# Altium PCB Nwatch.PcbDoc
Units mm, origin at the board's own origin, x right, y up, seen from the top; angles counter-clockwise.
Board outline 37.34 x 33.78 mm, 2 copper layers (Top Layer, Bottom Layer); 62 components, 59 nets, 208 pads, 89 vias.
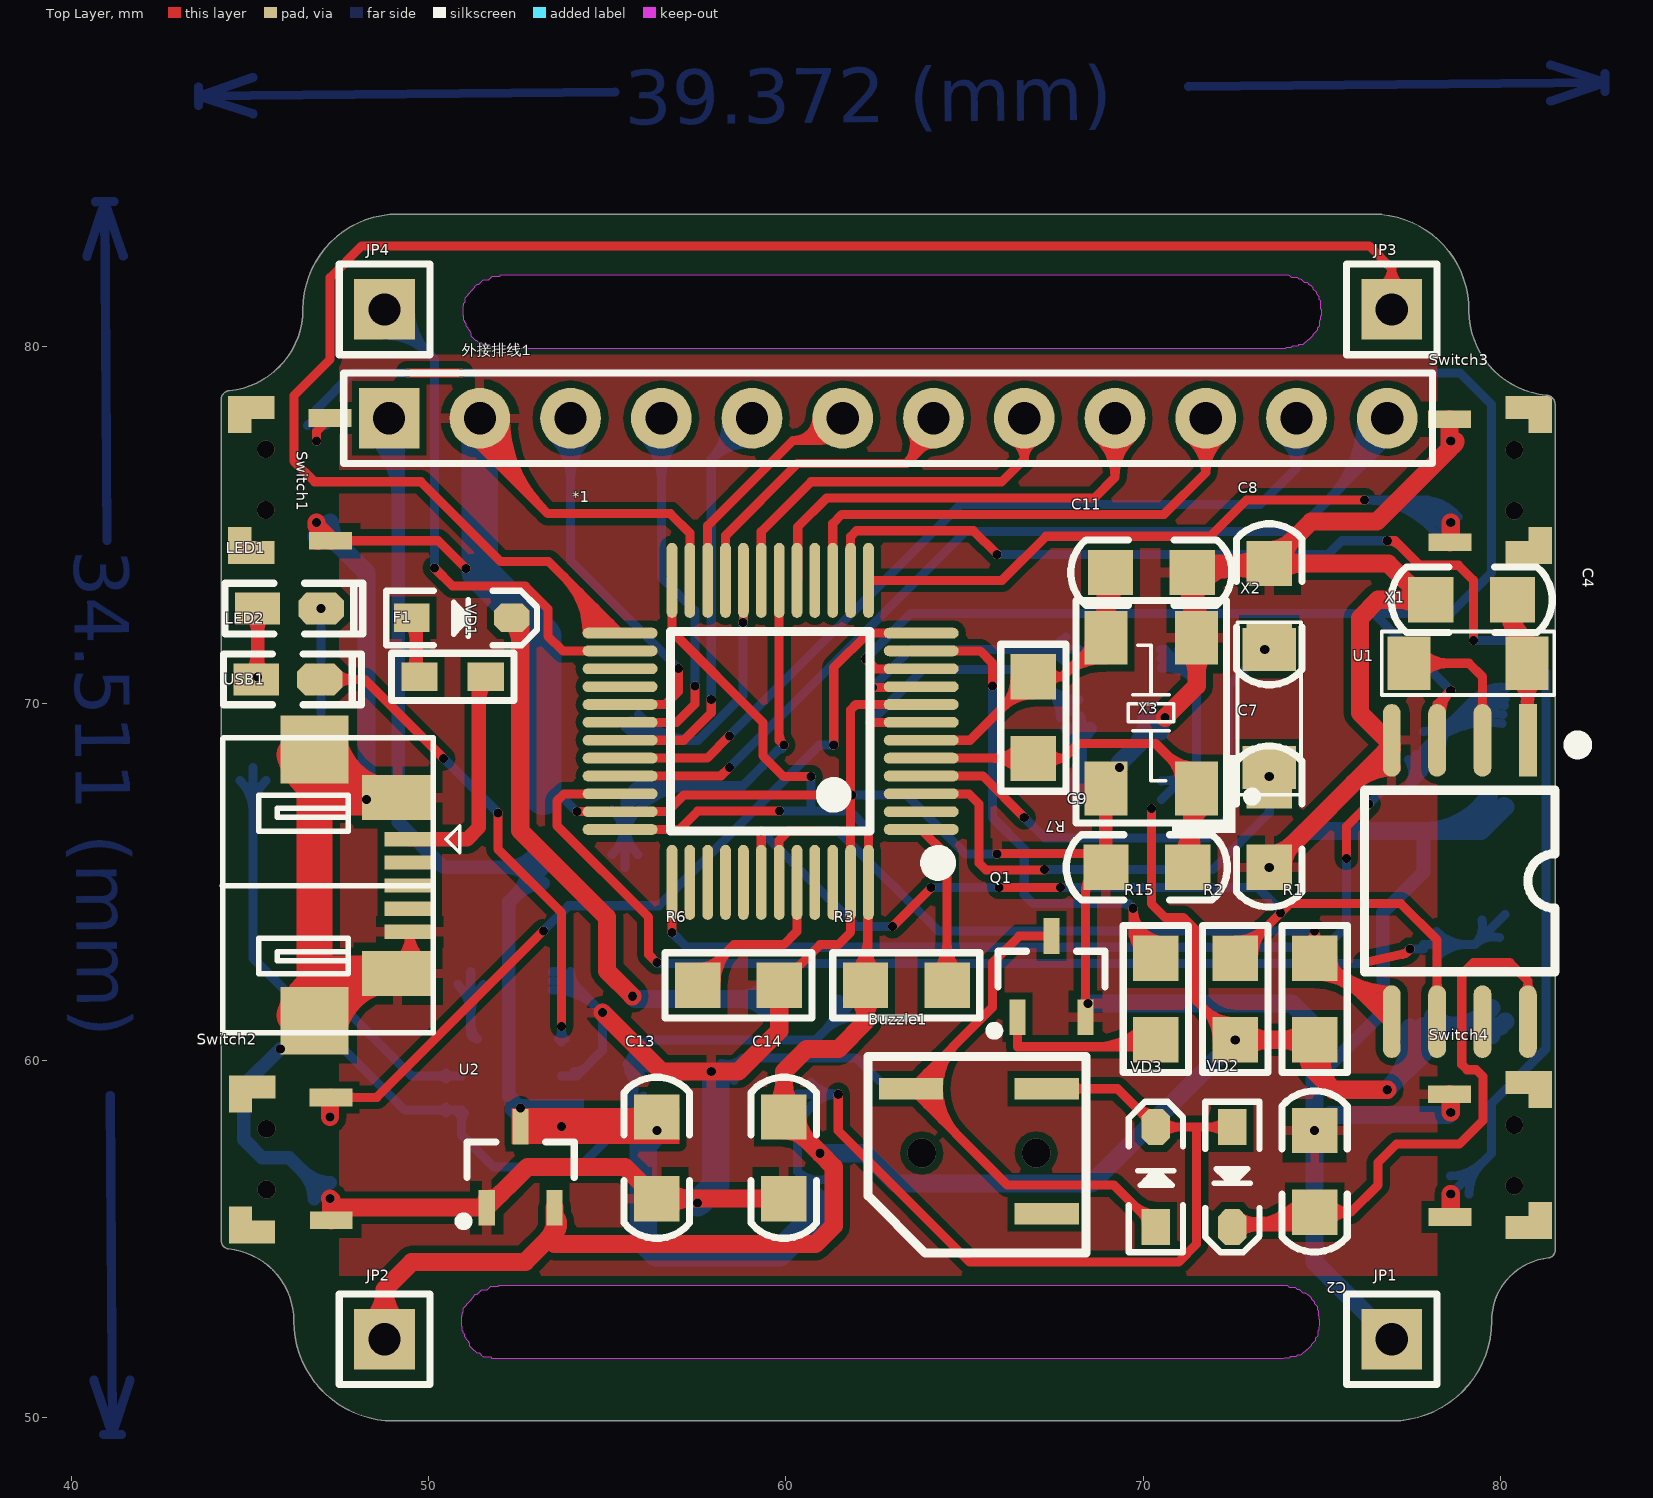
[diagram p0: Top Layer view]
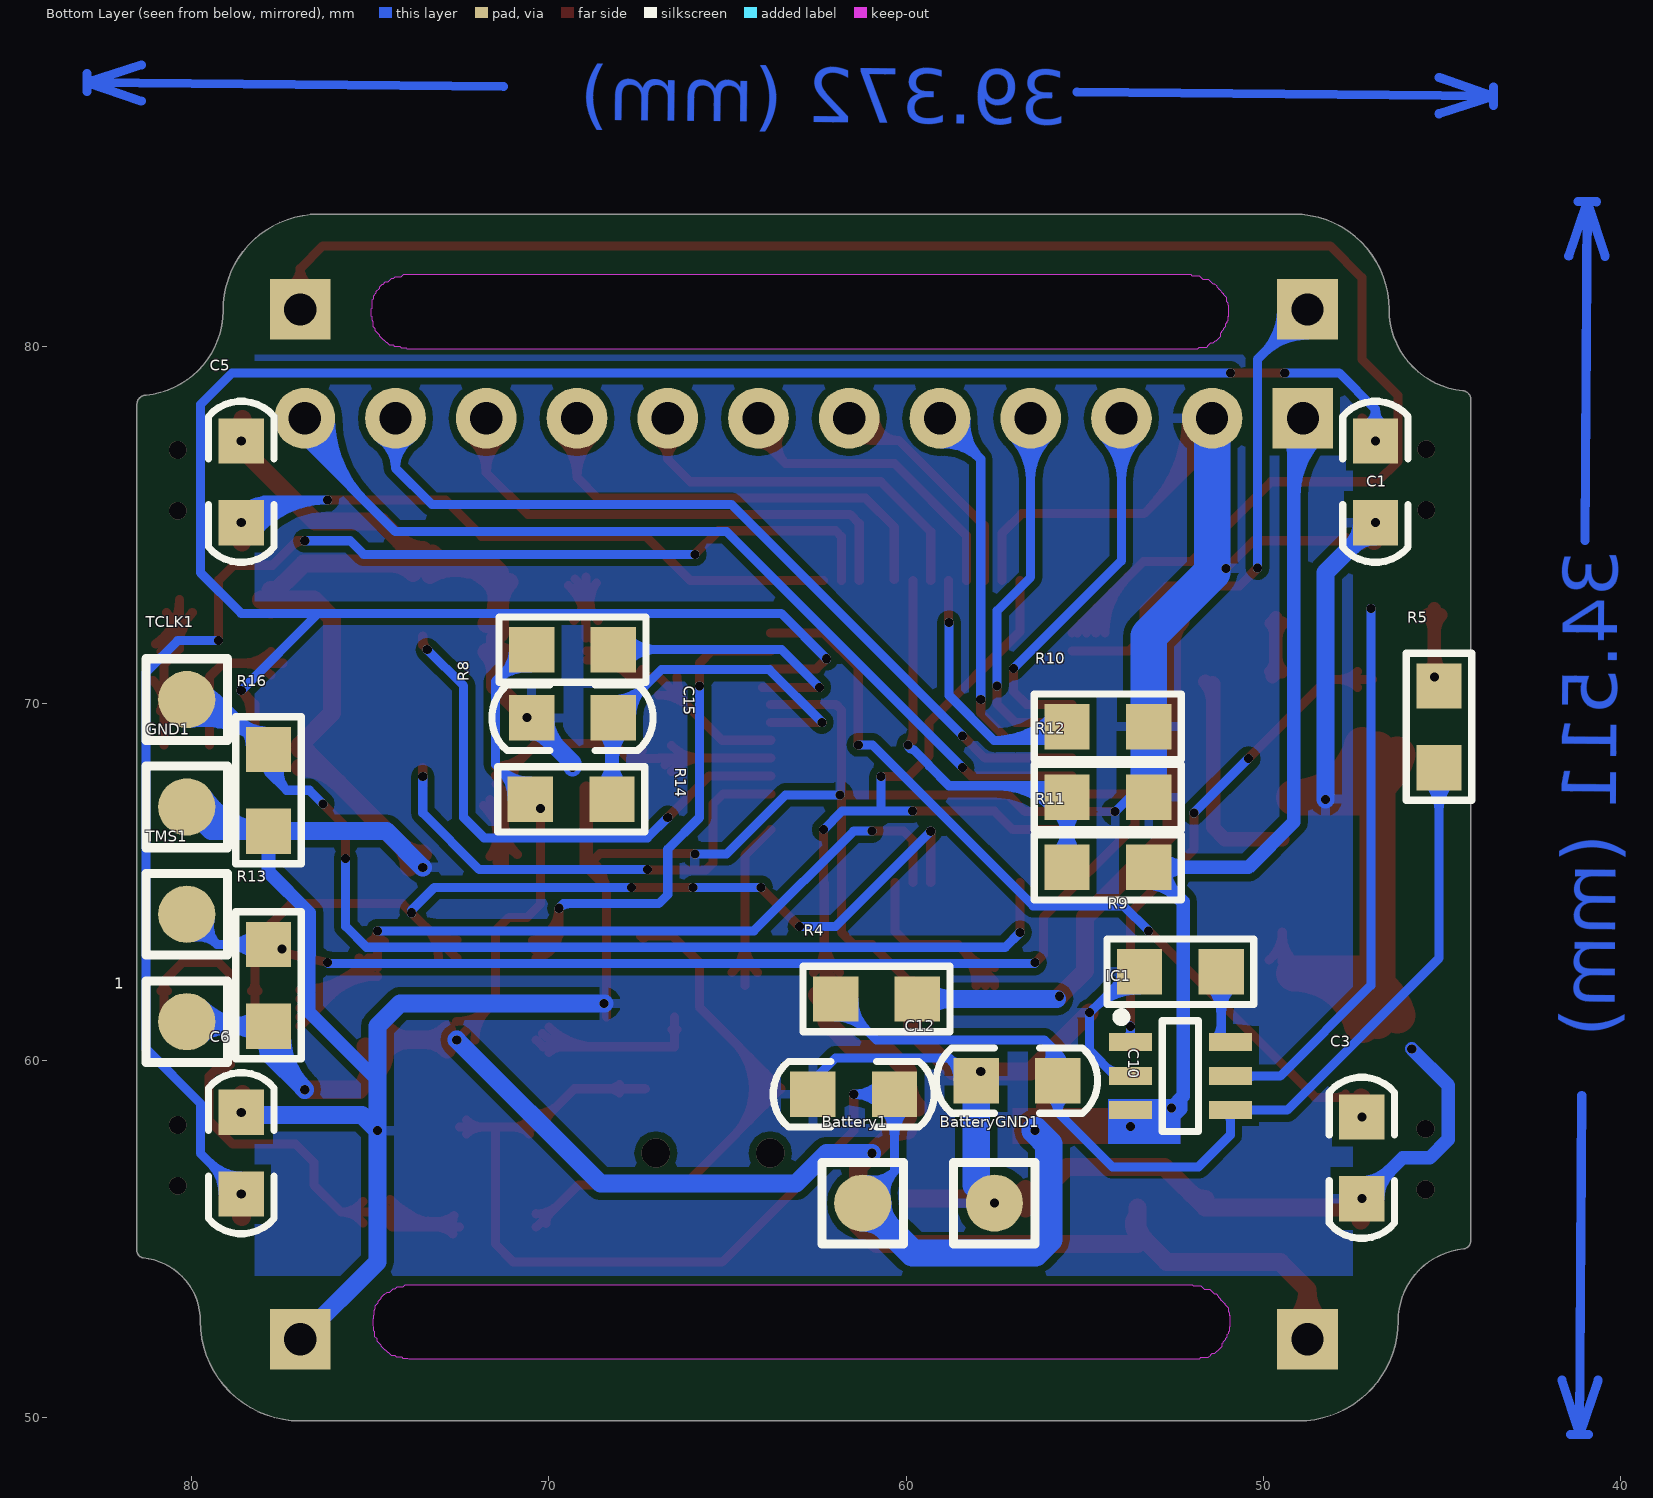
[diagram p1: Bottom Layer view, seen from below]

## Layer stack, top to bottom
Top Solder: solder mask 0.0102, Solder Resist, Dk 3.5
Top Layer: signal copper 0.0356
Dielectric 1: dielectric 0.32, FR-4, Dk 4.8
Bottom Layer: signal copper 0.0356
Bottom Solder: solder mask 0.0102, Solder Resist, Dk 3.5

## Board outline
46.228,52.705 ccw(c44.196,52.705) 44.395,54.727 cw(c44.427,54.959) 44.196,54.991 44.196,78.486 cw(c44.441,78.506) 44.42,78.751 ccw(c44.196,81.026) 46.482,81.026 cw(c49.149,81.026) 49.149,83.693 76.454,83.693 cw(c76.433,81.005) 79.121,80.984 ccw(c81.513,81.005) 81.279,78.624 cw(c81.274,78.364) 81.534,78.359 81.534,54.737 cw(c81.316,54.693) 81.36,54.474 ccw(c81.534,52.705) 79.756,52.705 cw(c76.962,52.705) 76.962,49.911 49.022,49.911 cw(c49.022,52.705)
cut-out: 51.025,81.349 51.115,81.439 51.115,81.469 51.125,81.469 51.225,81.569 51.235,81.569 51.235,81.589 51.295,81.649 51.295,81.669 51.355,81.729 51.405,81.729 51.535,81.859 51.685,81.859 51.785,81.959 51.995,81.959 52.025,81.989 74.085,81.989 74.145,81.929 74.315,81.929 74.365,81.879 74.415,81.879 74.515,81.779 74.595,81.779 74.655,81.719 74.675,81.719 74.755,81.639 74.755,81.609 74.845,81.519 74.845,81.479 74.925,81.399 74.925,81.309 74.955,81.279 74.955,81.149 74.965,81.139 74.965,81.049 74.985,81.029 74.985,80.849 74.965,80.829 74.965,80.729 74.935,80.699 74.935,80.559 74.875,80.499 74.875,80.439 74.755,80.319 74.755,80.289 74.645,80.179 74.625,80.179 74.555,80.109 74.545,80.109 74.465,80.029 74.365,80.029 74.325,79.989 74.175,79.989 74.135,79.949 73.995,79.949 73.975,79.929 51.835,79.929 51.795,79.969 51.585,79.969 51.525,80.029 51.525,80.039 51.475,80.089 51.405,80.089 51.345,80.149 51.325,80.149 51.195,80.279 51.195,80.359 51.175,80.379 51.165,80.379 51.165,80.409 51.105,80.469 51.105,80.499 51.055,80.549 51.055,80.619 51.025,80.649 51.025,80.659 51.015,80.669 51.015,80.689 50.985,80.719 50.985,80.829 50.975,80.839 50.975,81.129 50.985,81.139 50.985,81.199 51.025,81.239
cut-out: 50.977,53.07 51.067,53.16 51.067,53.19 51.077,53.19 51.177,53.29 51.187,53.29 51.187,53.31 51.247,53.37 51.247,53.39 51.307,53.45 51.357,53.45 51.487,53.58 51.637,53.58 51.737,53.68 51.947,53.68 51.977,53.71 74.037,53.71 74.097,53.65 74.267,53.65 74.317,53.6 74.367,53.6 74.467,53.5 74.547,53.5 74.607,53.44 74.627,53.44 74.707,53.36 74.707,53.33 74.797,53.24 74.797,53.2 74.877,53.12 74.877,53.03 74.907,53 74.907,52.87 74.917,52.86 74.917,52.77 74.937,52.75 74.937,52.57 74.917,52.55 74.917,52.45 74.887,52.42 74.887,52.28 74.827,52.22 74.827,52.16 74.707,52.04 74.707,52.01 74.597,51.9 74.577,51.9 74.507,51.83 74.497,51.83 74.417,51.75 74.317,51.75 74.277,51.71 74.127,51.71 74.087,51.67 73.947,51.67 73.927,51.65 51.787,51.65 51.747,51.69 51.537,51.69 51.477,51.75 51.477,51.76 51.427,51.81 51.357,51.81 51.297,51.87 51.277,51.87 51.147,52 51.147,52.08 51.127,52.1 51.117,52.1 51.117,52.13 51.057,52.19 51.057,52.22 51.007,52.27 51.007,52.34 50.977,52.37 50.977,52.38 50.967,52.39 50.967,52.41 50.937,52.44 50.937,52.55 50.927,52.56 50.927,52.85 50.937,52.86 50.937,52.92 50.977,52.96 50.977,52.98

## Design rules (kind name [scope] priority, off if disabled: settings)
Clearance [All] p1: gap=0.203
PolygonConnect [All] p1: connectstyle=Relief reliefconductorwidth=0.254 reliefentries=4 polygonreliefangle="90 Angle" airgapwidth=0.254
RoutingVias [All] p1: holewidth=0.711 width=1.27 viastyle="Through Hole" minholewidth=0.711 minwidth=1.27 maxholewidth=0.711 maxwidth=1.27
SolderMaskExpansion [All] p1: expansion=0.102
Width [All] p1: maxlimit=1.27 minlimit=0.254 preferedwidth=0.254
29 further rules are at their usual default settings.

## Components (designator, comment, footprint, x,y, rotation, side; value= is the part's Value field where it differs from the comment)
1 "TEST" "TEST 1.6" 80.137,61.087 r0 bottom
*1 "STM32F103C8T6" "LQFP48 7x7_M" 59.563,69.215 r90 top
Battery1 "TEST" "TEST 1.6" 61.214,56.007 r90 bottom
BatteryGND1 "TEST" "TEST 1.6" 57.531,56.007 r180 bottom
Buzzle1 "5020 5*5*2MM SMD无源蜂鸣器" "5020 5*5*2MM SMD贴片超薄超小电磁式无源蜂鸣器" 65.405,54.61 r180 top
C1 "104" "C 0805" 46.863,76.2 r90 bottom
C2 "104" "C 0805" 74.803,56.896 r90 top
C3 "104" "C 0805" 47.244,57.277 r90 bottom
C4 "104" "C 0805" 79.2,72.898 r0 top
C5 "104" "C 0805" 78.613,76.2 r270 bottom
C6 "104" "C 0805" 78.613,57.404 r270 bottom
C7 "15pF" "C 0805" 73.533,66.548 r90 top
C8 "15pF" "C 0805" 73.533,72.771 r270 top
C9 "22pF" "C 0805" 70.104,65.405 r0 top
C10 "105" "C 0805" 56.896,59.436 r180 bottom
C11 "22pF" "C 0805" 70.231,73.66 r180 top
C12 "105" "C 0805" 61.468,59.055 r180 bottom
C13 "104" "C 0805" 56.388,57.277 r90 top
C14 "104" "C 0805" 59.944,57.277 r90 top
C15 "104" "C 0805" 69.342,69.596 r180 bottom
F1 "1A" "R 0603" 50.673,70.739 r0 top
GND1 "TEST" "TEST 1.6" 80.137,67.098 r90 bottom
IC1 "TP4057" SOT23-6N 52.324,59.563 r270 bottom
JP1 "HDR-1X1" HDR-1X1 76.962,52.197 r0 top
JP2 "HDR-1X1" HDR-1X1 48.768,52.197 r0 top
JP3 "HDR-1X1" HDR-1X1 76.962,81.026 r0 top
JP4 "HDR-1X1" HDR-1X1 48.768,81.026 r0 top
LED1 "绿色" "LED 0603G" 46.101,72.644 r0 top
LED2 "红色" "LED 0603R" 46.063,70.66 r0 top
Q1 "S9014" SOT23-3L 67.437,62.357 r0 top
R1 "10K" "R 0805" 74.803,61.722 r90 top
R2 "10K" "R 0805" 72.581,61.722 r90 top
R3 "0R" "R 0805" 63.373,62.103 r0 top
R4 "0.8R" "R 0805" 60.833,61.722 r180 bottom
R5 "100k" "R 0805" 45.085,69.342 r270 bottom
R6 "10k" "R 0805" 58.674,62.103 r0 top
R7 "1M" "R 0805" 66.929,69.596 r270 top
R8 "0" "R 0805" 69.342,71.501 r180 bottom
R9 "2K" "R 0805" 52.324,62.484 r180 bottom
R10 "10k" "R 0805" 54.356,69.342 r0 bottom
R11 "1K" "R 0805" 54.356,65.405 r180 bottom
R12 "1K" "R 0805" 54.356,67.373 r0 bottom
R13 "10K" "R 0805" 77.851,62.103 r270 bottom
R14 "10k" "R 0805" 69.376,67.31 r0 bottom
R15 "470R" "R 0805" 70.358,61.722 r270 top
R16 "10K" "R 0805" 77.851,67.564 r90 bottom
Switch1 "Switch" 侧按键 46.838,76.298 r90 top
Switch2 "Switch" 侧按键 46.863,57.277 r90 top
Switch3 "Switch" 侧按键 78.994,76.2 r270 top
Switch4 "Switch" 侧按键 78.994,57.306 r270 top
TCLK1 "TEST" "TEST 1.6" 80.137,70.104 r0 bottom
TMS1 "TEST" "TEST 1.6" 80.137,64.093 r0 bottom
U1 "PCF8563T/F4" SOP8W_L 78.867,65.024 r270 top
U2 "XC6206P332MR" SOT23-3L 52.578,57.023 r0 top
USB1 "USB-5P" USB-MICRO_A 47.117,64.897 r270 top
VD1 "1N4148" SOD-323 50.927,72.39 r0 top
VD2 "1N4148" SOD-323 72.499,56.736 r270 top
VD3 "1N4148" SOD-323 70.358,56.736 r90 top
X1 "32.768 KHz" XTAL-3215 79.095,71.12 r0 top
X2 "32.768 KHz" XTAL-3215 73.533,69.85 r270 top
X3 "8M" XTAL-5032 70.231,69.723 r90 top
外接排线1 "HDR-1X12" HDR-1X12 48.895,77.978 r0 top

## Footprints (in the part's own frame and the unit in brackets; to place one, negate y for a bottom-side part, rotate by r counter-clockwise, add the part's x,y. Pads: shape width x height; smd on the part's side, far side on the other; paste and mask are expansions set on the pad)
"5020 5*5*2MM SMD贴片超薄超小电磁式无源蜂鸣器" [mm] "5020 5*5*2MM SMD贴片超薄超小电磁式无源蜂鸣器"
  rect 1.8x0.6 / inner rect 0x0 / far side rect 0x0 all layers, no hole paste+0 mask+0.102: 1(-1.9,-4.6) 2(1.9,-4.6) 3(-1.9,-1.1)
  silkscreen extent -3,-5.5 3.1,0, body extent -2.6,-5.4 2.6,-0.2, height 2
"C 0805" [mil] "无极性贴片电容"
  rect 50x50 smd: 1(-45,0) 2(45,0)
  silkscreen extent -89,-36 89,36, body extent -39,-24 39,24, height 20
HDR-1X1 [mm] "排针，1脚"
  rect 1.7x1.7 hole 0.9: 1(0,0)
  silkscreen extent -1.27,-1.27 1.27,1.27, body extent -1.27,-1.27 1.27,1.27, height 8.5
HDR-1X12 [mm] "排针，13脚"
  rect 1.7x1.7 hole 0.9: 1(0,0)
  round 1.7 hole 0.9: 2(2.54,0) 3(5.08,0) 4(7.62,0) 5(10.16,0) 6(12.7,0) 7(15.24,0) 8(17.78,0) 9(20.32,0) 10(22.86,0) 11(25.4,0) 12(27.94,0)
  silkscreen extent -1.27,-1.27 29.21,1.27, body extent -1.27,-1.27 29.21,1.27, height 8.5
"LED 0603G" [mil] "绿色0603LED"
  rect 50x35 smd: 1(-35,0.26)
  oct 50x35 smd: 2(35,0.26)
  silkscreen extent -71,-28 81,28, body extent -31,-16 32,16, height 24
"LED 0603R" [mil] "红色0603LED"
  rect 50x35 smd: 1(-35,0.26)
  oct 50x35 smd: 2(35,0.26)
  silkscreen extent -71,-28 81,28, body extent -31,-16 32,16, height 24
"LQFP48 7x7_M" [mm] "48脚，体宽7x7mm，脚距0.5mm"
  oval 0.3x2.1 smd: 1(-2.75,-4.227) 2(-2.25,-4.227) 3(-1.75,-4.227) 4(-1.25,-4.227) 5(-0.75,-4.227) 6(-0.25,-4.227) 7(0.25,-4.227) 8(0.75,-4.227) 9(1.25,-4.227) 10(1.75,-4.227) 11(2.25,-4.227) 12(2.75,-4.227) 25(2.75,4.202) 26(2.25,4.202) 27(1.75,4.202) 28(1.25,4.202) 29(0.75,4.202) 30(0.25,4.202) 31(-0.25,4.202) 32(-0.75,4.202) 33(-1.25,4.202) 34(-1.75,4.202) 35(-2.25,4.202) 36(-2.75,4.202)
  oval 2.1x0.3 smd: 13(4.227,-2.75) 14(4.227,-2.25) 15(4.227,-1.75) 16(4.227,-1.25) 17(4.227,-0.75) 18(4.227,-0.25) 19(4.227,0.25) 20(4.227,0.75) 21(4.227,1.25) 22(4.227,1.75) 23(4.227,2.25) 24(4.227,2.75) 37(-4.227,2.75) 38(-4.227,2.25) 39(-4.227,1.75) 40(-4.227,1.25) 41(-4.227,0.75) 42(-4.227,0.25) 43(-4.227,-0.25) 44(-4.227,-0.75) 45(-4.227,-1.25) 46(-4.227,-1.75) 47(-4.227,-2.25) 48(-4.227,-2.75)
  silkscreen extent -3.93,-4.95 2.79,2.79, body extent -4.5,-4.5 4.5,4.5, height 1.45
"R 0603" [mil] "1/10W贴片电阻"
  rect 40x31.5 smd: 1(-36.5,0) 2(36.5,0)
  silkscreen extent -68,-26 68,26, body extent -31,-16 32,16, height 16
"R 0805" [mil] "1/8W贴片电阻"
  rect 50x50 smd: 1(-45,0) 2(45,0)
  silkscreen extent -81,-36 81,36, body extent -39,-25 39,25, height 20
SOD-323 [mm] "1.8x1.3X0.9mm（长宽高，不包括引脚）"
  rect 1x0.8 smd: 1(-1.4,0)
  oct 1x0.8 smd: 2(1.4,0)
  silkscreen extent -2.11,-0.76 2.11,0.76, body extent -1.34,-0.63 1.31,0.67, height 1
SOP8W_L [mm] "5.3*8.3*1.8mm（长宽高）"
  rect 2.032x0.5 smd: 1(-3.937,1.905)
  oval 2.032x0.5 smd: 2(-3.937,0.635) 3(-3.937,-0.635) 4(-3.937,-1.905) 5(3.937,-1.905) 6(3.937,-0.635) 7(3.937,0.635) 8(3.937,1.905)
  silkscreen extent -3.96,-2.67 2.54,3.46, body extent -3.94,-2.64 3.94,2.64, height 1.9
SOT23-3L [mm] "3x1.3x1mm(长宽高)"
  rect 0.45x1 smd: 1(-0.95,-1.143) 2(0.95,-1.143) 3(0,1.125)
  silkscreen extent -1.72,-1.65 1.5,0.7, body extent -1.5,-1.2 1.5,1.2, height 1.05
SOT23-6N [mm] "3x1.6x1.1mm(长宽高)"
  rect 0.5x1.2 smd: 1(-0.95,-1.4) 2(0,-1.4) 3(0.95,-1.4) 4(0.95,1.4) 5(0,1.4) 6(-0.95,1.4)
  silkscreen extent -1.78,-1.78 1.55,0.51, body extent -1.5,-1.4 1.5,1.4, height 1.15
"TEST 1.6" [mm] "测试点1.6mm"
  round 1.6 smd: 1(0,0)
  silkscreen extent -1.14,-1.14 1.14,1.14
USB-MICRO_A [mm] "micro型USB ，5.9*8.2*2.5mm"
  rect 0.4x1.4 smd: 1(-1.296,2.355) 2(-0.648,2.355) 3(0,2.355) 4(0.648,2.355) 5(1.295,2.355)
  rect 1.9x1.9 smd: 5(-3.81,-0.312) 5(3.784,-0.312)
  rect 1.25x2 smd: 5(-2.464,2.025) 5(2.464,2.025)
  silkscreen extent -4.14,-2.89 4.11,3.75, body extent -3.98,-2.77 3.98,2.65, height 2.69
XTAL-3215 [mm]
  rect 1.2x1.5 smd: 1(-1.65,0) 2(1.65,0)
  silkscreen extent -2.41,-0.89 2.41,0.89, body extent -1.6,-0.75 1.6,0.75, height 0.81
XTAL-5032 [mm]
  rect 1.5x1.2 smd: 1(-2.108,-1.27) 2(2.108,-1.27) 3(2.108,1.27) 4(-2.108,1.27)
  silkscreen extent -3.35,-2.95 3.15,2.11, body extent -2.5,-1.6 2.5,1.6, height 1
侧按键 [mm] "侧边按键的轻触开关2*4*3.5mm"
  rect 0.5x1.2 smd: 1(-1.749,-0.413) 2(1.691,-0.403)
  rect 0.65x1.3 smd: ""(-2.079,1.807) ""(1.981,1.797)
  rect 0.4x0.65 smd: ""(-1.559,2.127) ""(1.461,2.127)
  body extent -2.35,-0.81 2.3,3.49, height 1.9

## Part data
1 Battery1 BatteryGND1 GND1 TCLK1 TMS1: "测试点"
Buzzle1: library part "5020 SMD无源蜂鸣器", "5020 5*5*2MM SMD贴片超薄超小电磁式无源蜂鸣器"
C1 C2 C3 C4 C5 C6 C10 C12: library part C, "无极性贴片电容"
C7 C8 C9 C11 C13 C14 C15: library part "Cap  贴片"
F1: library part FUSE
IC1: library part TP4057/4059, "500mA/600mA锂电池充电管理IC"
JP1 JP2 JP3 JP4: library part "Header 1", "1P接插件"
LED1 LED2: library part LED-SMD, "贴片LED"
Q1: library part 9014-SMD, "低噪放大-NPN型"
R1 R2 R4 R5 R9 R11 R12 R13 R15 R16: library part R, "贴片电阻"
R3 R6 R7 R8 R10 R14: library part "Res  贴片"
Switch1 Switch2 Switch3 Switch4: library part 2X4X3.5侧按键, "测贴 轻触开关 2*4*3.5MM"
U1: library part PCF8563T, "时钟芯片"
U2: library part AMS1117
USB1: "微型USB母座"
VD1 VD2 VD3: "高速开关二极管"
X1 X2: library part XTAL, "Crystal Oscillator"
X3: library part XTAL-4, "4脚晶振"
外接排线1: library part "Header 12", "12P接插件"

## Via types
v1: diameter 0.254, hole 0.254, Top Layer to Bottom Layer, 79 vias
v2: diameter 0.5, hole 0.5, Top Layer to Bottom Layer, 8 vias
v3: diameter 0.8, hole 0.8, Top Layer to Bottom Layer, 2 vias

## Nets (pads, with @x,y where several pads share a name; then routed paths per layer and width w, separated by ;. In a path a pad name is that pad's centre, name@x,y a point inside that pad or via, vN(x,y) a via of type N, cw(c..) or ccw(c..) an arc to the next point about the centre after c; other vN are vias at no path point)
3V3: 1.1 *1.24 *1.36 *1.48 C14.2 JP2.1 R1.1 R2.1 R3.1 R8.1 R13.2 R14.2 U2.2 | length 112.9
  Top Layer w0.254: *1.36 57.016,66.465 57.531,66.98 v1(59.817,66.98) ; *1.24 56.813,72.009 59.356,69.466 59.356,68.533 59.944,67.945 v1(60.706,67.945) ; R3.1@61.871,62.462 ccw(c60.851,63.482) 62.293,63.482 ; R3.1@62.05,62.283 ccw(c61.464,62.869) 62.293,62.869 ; R3.1 62.293,62.166 62.293,64.968 *1.48 v1(62.313,66.465) ; 62.293,63.177 ccw(c63.304,63.177) R3.1@62.589,62.462 ; v1(70.231,67.056) 70.231,64.389 70.612,64.008 71.12,64.008 71.501,63.627 71.501,61.658 v1(72.581,60.579) ; R2.1@72.072,60.579 ccw(c70.846,60.579) 71.713,61.446 ccw(c72.581,62.313) R2.1@72.581,61.087
  Top Layer w0.508: JP2.1@48.356,52.627 ccw(c47.429,53.594) 48.768,53.594 ; JP2.1 48.768,53.594 ; JP2.1@49.18,52.627 cw(c50.107,53.594) 48.768,53.594 ; 53.276,54.927 ccw(c52.599,55.605) U2.2@53.557,55.605 ; U2.2@53.55,55.623 cw(c53.293,55.414) 53.528,55.179 ; C14.2@59.675,58.689 ccw(c59.024,59.34) 59.944,59.34 ccw(c60.864,59.34) C14.2@60.213,58.689 ; C14.2@59.944,58.039 cw(c59.944,57.119) 60.594,57.77 cw(c61.245,58.42) C14.2@60.325,58.42 ; R3.1@61.961,61.834 cw(c61.31,61.183) 62.23,61.183 cw(c63.15,61.183) R3.1@62.499,61.834 ; R3.1 62.23,61.087 61.468,60.325 60.579,60.325 59.944,59.69 C14.2 v1(60.96,57.404) 61.341,57.023 61.341,55.372 60.833,54.864 53.528,54.864 U2.2 53.528,55.179 ; v1(72.581,60.579) R1.1 74.803,59.69 ; R2.1@72.85,60.31 cw(c73.5,59.659) 73.5,60.579 cw(c73.5,61.499) R2.1@72.85,60.848 ; R1.1@74.534,60.31 ccw(c73.883,59.659) 73.883,60.579 ccw(c73.883,61.499) R1.1@74.534,60.848 ; R1.1@74.54,60.303 cw(c73.956,59.69) 74.803,59.69 ; R1.1@74.692,60.64 ccw(c75.415,60.244) 74.832,59.661 ; R1.1@75.066,60.303 ccw(c75.65,59.69) 74.803,59.69 ; R1.1@75.137,60.396 ccw(c76.034,59.905) 75.311,59.182 ; v1(76.835,59.182) 75.311,59.182 ; 48.768,53.594 49.53,54.356 52.705,54.356 53.528,55.179 ; 74.803,59.69 75.311,59.182
  Bottom Layer w0.254: v1(59.817,66.98) 61.798,66.98 v1(62.313,66.465) ; 60.706,66.98 v1(60.706,67.945) ; R8.1 70.612,71.501 71.501,70.612 ; R8.1@70.498,71.247 cw(c70.537,70.458) R8.1@71.096,71.017 ; R8.1@70.51,70.994 cw(c70.576,69.687) 71.501,70.612 ; R14.2 71.501,68.292 71.501,70.612 ; R14.2@70.519,67.818 ccw(c70.519,69.044) 71.387,68.177 ccw(c72.254,67.31) R14.2@71.027,67.31 ; R8.1@70.993,71.501 ccw(c71.913,71.501) 71.262,70.851
  Bottom Layer w0.508: v1(60.96,57.404) 62.23,57.404 63.081,56.553 68.554,56.553 v1(72.581,60.579) ; R13.2@77.471,60.927 cw(c75.279,60.738) v1(76.835,59.182) 77.851,60.198 ; 77.607,59.954 ccw(c76.7,60.861) R13.2@77.978,60.971 ; R13.2@77.622,60.655 cw(c77.28,60.198) 77.851,60.198 ; R13.2@78.08,60.655 ccw(c78.422,60.198) 77.851,60.198 ; R13.2@78.12,60.691 cw(c78.771,60.04) 78.771,60.96 cw(c78.771,61.88) R13.2@78.12,61.229 ; 78.512,60.96 ccw(c78.512,62.712) 1.1@79.751,61.473 ; 79.125,60.96 cw(c79.125,60.075) 1.1@79.751,60.701 ; 1.1 80.01,60.96 R13.2 77.851,60.198
+: Battery1.1 Buzzle1.1 C12.2 C13.2 IC1.3 R11.2 U2.3 VD2.1 VD3.2 外接排线1.1 | length 84.1
  Top Layer w0.254: v1(61.468,59.055) 61.468,58.039 65.151,54.356 70.993,54.356 71.501,54.864 71.501,58.136 ; Buzzle1.1 69.284,59.21 VD3.2 71.501,58.136 ; Buzzle1.1@68.027,59.088 cw(c68.323,58.792) 68.323,59.21 cw(c68.323,59.628) Buzzle1.1@68.027,59.332 ; 69.721,58.773 ccw(c70.358,59.41) VD3.2@70.358,58.509 ; 69.963,58.531 cw(c69.667,58.236) VD3.2@70.085,58.236 ; VD3.2@70.551,57.943 cw(c71.017,57.477) 71.017,58.136 cw(c71.017,58.795) VD3.2@70.551,58.329 ; VD2.1@72.306,57.943 ccw(c71.84,57.477) 71.84,58.136 ccw(c71.84,58.795) VD2.1@72.306,58.329 ; VD2.1 71.501,58.136
  Top Layer w0.508: v1(53.721,58.148) 56.116,58.148 C13.2 ccw(c56.708,58.1) C13.2@56.263,58.015 ; 54.812,58.148 ccw(c54.812,59.996) C13.2@56.119,58.689
  Bottom Layer w0.254: 52.248,59.004 52.248,58.623 52.723,58.148 v1(53.721,58.148) 53.724,58.151 IC1.3 ; IC1.3@53.637,58.526 cw(c53.427,58.316) 53.724,58.316 cw(c54.021,58.316) IC1.3@53.811,58.526 ; C12.2@59.966,58.696 cw(c59.099,57.829) 60.325,57.829 cw(c61.551,57.829) C12.2@60.684,58.696 ; Battery1.1@60.554,56.139 ccw(c59.733,56.304) 60.325,56.896 ; C12.2@60.702,58.715 cw(c61.468,58.023) v1(61.468,59.055) ; C12.2@60.702,59.395 ccw(c61.468,60.087) v1(61.468,59.055) ; Battery1.1@61.082,56.667 cw(c60.917,57.488) 60.325,56.896 ; Battery1.1 60.325,56.896 ; 60.325,56.896 C12.2 v1(61.468,59.055)
  Bottom Layer w0.381: 外接排线1.1@48.429,77.512 cw(c46.69,75.773) 49.149,75.773 ; 外接排线1.1@48.698,77.781 cw(c47.609,76.692) 49.149,76.692 ; 外接排线1.1 49.149,77.724 49.149,66.675 50.419,65.405 R11.2 52.248,64.44 52.248,59.004 v1(52.578,58.674) ; 49.149,76.999 cw(c49.874,76.999) 外接排线1.1@49.361,77.512 ; R11.2@52.768,65.405 cw(c51.695,65.405) 52.454,64.646 cw(c53.213,63.887) R11.2@53.213,64.96 ; R11.2@52.899,65.091 ccw(c52.14,64.332) 52.14,65.405 ccw(c52.14,66.478) R11.2@52.899,65.719
  Bottom Layer w0.762: v1(56.388,58.039) 56.007,57.658 56.007,54.991 56.388,54.61 59.817,54.61 Battery1.1 ; Battery1.1@60.795,56.007 cw(c59.783,56.007) 60.499,55.292 cw(c61.214,54.576) Battery1.1@61.214,55.588
ADC: *1.18 R11.1 R12.2 | length 19.9
  Top Layer w0.254: 59.813,69.15 ccw(c60.26,69.15) v1(59.944,68.834) 59.813,68.965 *1.18
  Bottom Layer w0.254: R11.1@55.14,65.764 ccw(c54.273,66.631) 55.499,66.631 ccw(c56.725,66.631) R11.1@55.858,65.764 ; R12.2@55.14,67.014 cw(c54.273,66.147) 55.499,66.147 cw(c56.725,66.147) 55.858,67.014 cw(c57.492,65.381) 57.492,67.691 ; R11.1 R12.2 ; R12.2@55.679,67.194 cw(c56.879,65.994) 56.879,67.691 ; 56.266,67.691 ccw(c56.266,66.607) R12.2 ; 59.817,68.707 59.805,68.707 ; v1(59.944,68.834) cw(c59.805,68.846) 59.805,68.707 ; R12.2 55.816,67.691 58.801,67.691 59.36,68.25 59.36,68.261 59.805,68.707
BOOT0: *1.44 R6.1 | length 7.5
  Top Layer w0.254: R6.1 57.531,62.23 58.547,63.246 59.944,63.246 60.313,63.615 *1.44 ; R6.1@57.531,62.611 ccw(c57.531,63.531) 58.181,62.88 ; R6.1@57.785,62.103 cw(c58.705,62.103) 58.054,62.753 ; R6.1@58.039,62.103 cw(c59.572,62.103) 58.488,63.187
BUZZLE: *1.11 R15.1 | length 17.7
  Top Layer w0.254: *1.11 65.441,71.465 65.786,71.12 v1(65.786,70.485) ; 69.723,63.641 ccw(c70.515,63.641) R15.1 69.723,63.5 v1(69.723,64.262) ccw(c70.64,64.262) R15.1@70.459,63.363 ; 69.723,63.952 ccw(c70.577,63.952) R15.1@70.408,63.114
  Bottom Layer w0.254: v1(65.786,70.485) 65.786,66.802 66.675,65.913 66.675,64.643 66.929,64.389 69.596,64.389 v1(69.723,64.262) ccw(c69.416,63.955) 69.416,64.389
D+: USB1.3
D-: USB1.2
GND: *1.8 *1.23 *1.35 *1.47 BatteryGND1.1 C1.1 C2.2 C3.1 C4.1 C5.1 C6.1 C7.1 C8.1 C9.1 C10.1 C11.1 C12.1 C13.1 C14.1 C15.1 GND1.1 IC1.2 JP1.1 Q1.2 R6.2 R9.1 R10.1 R12.1 R16.1 Switch1.1 Switch2.1 Switch3.1 Switch4.1 U1.4 U2.1 USB1.5 X3.2 X3.4 外接排线1.2 | length 252.2
  Top Layer w0.254: Switch1.1 47.276,74.549 50.269,74.549 v1(51.042,73.775) ; Switch1.1@47.688,74.462 cw(c47.898,74.252) 47.898,74.549 cw(c47.898,74.846) Switch1.1@47.688,74.636 ; USB1.5@49.142,62.433 49.472,62.764 49.472,63.602 ccw(c50.503,63.602) USB1.5@49.838,62.814 ; USB1.5@49.165,62.786 ccw(c48.423,63.527) USB1.5@49.472,63.527 ; 外接排线1.2@51.396,77.978 ccw(c53.141,77.978) 51.907,76.744 ; 外接排线1.2 51.435,77.216 53.34,75.311 56.769,75.311 57.313,74.767 *1.23 ; 外接排线1.2@51.65,77.978 ccw(c54.009,77.978) 52.341,76.31 ; 外接排线1.2@51.904,77.978 ccw(c54.876,77.978) 52.774,75.877 ; 外接排线1.2@52.158,77.978 ccw(c55.743,77.978) 53.208,75.443 ; v1(54.15,66.965) *1.35 56.678,66.965 57.15,67.437 61.686,67.437 ; R6.2 60.96,63.246 61.468,63.246 61.813,63.591 *1.47 61.813,69.814 61.964,69.965 *1.8 ; v1(65.913,65.786) 65.926,65.799 68.567,65.799 C9.1 68.387,64.831 Q1.2 ; 68.387,64.632 cw(c69.734,64.632) C9.1@68.781,65.585
  Top Layer w0.381: C9.1 X3.4
  Top Layer w0.508: v1(46.863,75.057) v1@46.863,74.962 ; Switch1.1@46.904,74.547 ccw(c46.63,74.729) v1@46.863,74.962 ; v1(47.244,56.134) 47.276,56.102 Switch2.1 ; Switch1.1@47.276,74.549 v1@46.863,74.962 ; 47.498,55.88 U2.1 52.771,57.023 55.499,57.023 C13.1 C14.1 ; U2.1@51.628,56.126 ccw(c51.628,56.72) 52.048,56.3 ; v1(54.864,61.341) 56.515,59.69 v1@57.785,59.69 ; C13.1@56.657,55.865 cw(c57.308,55.214) 57.308,56.134 cw(c57.308,57.054) C13.1@56.657,56.403 ; v1(57.912,59.69) v1@57.785,59.69 ; R6.2 59.817,60.833 58.674,59.69 v1@57.785,59.69 ; v1(70.612,69.596) 71.501,70.485 X3.2 ; C11.1@71.105,73.391 cw(c70.454,72.74) 71.374,72.74 cw(c72.294,72.74) 71.643,73.391 cw(c72.907,72.127) C8.1@72.907,73.914 ; X3.2@71.256,71.437 cw(c70.666,70.846) 71.501,70.846 cw(c72.336,70.846) X3.2@71.746,71.437 ; X3.2@71.374,71.958 C11.1 71.628,73.914 C8.1 ; C11.1@71.374,73.123 ccw(c72.643,73.123) X3.2@71.746,72.226 ; 71.482,72.721 cw(c72.176,72.907) C11.1@71.652,73.399 ; 72.285,73.747 cw(c72.628,72.466) C8.1@73.331,73.591 ; C8.1@73.264,73.645 ccw(c72.613,72.994) 72.613,73.914 ccw(c72.613,74.834) C8.1@73.264,74.183 ; v1(73.533,65.405) 76.962,68.834 76.073,69.723 76.073,72.39 76.581,72.898 C4.1@77.878,72.898 ; C7.1@73.533,65.786 ccw(c73.533,66.706) 74.183,66.055 ccw(c74.834,65.405) C7.1@73.914,65.405 ; C8.1@73.533,74.295 ccw(c73.533,75.215) 74.183,74.564 ccw(c74.834,73.914) C8.1@73.914,73.914 ; C8.1@73.802,73.645 cw(c74.453,72.994) 74.453,73.914 cw(c74.453,74.834) C8.1@73.802,74.183 ; 75.878,67.75 cw(c76.962,66.667) U1.4@76.962,68.199 ; U1.4@76.745,68.617 cw(c76.962,68.401) U1.4@76.962,68.707 ; C4.1@77.788,72.629 ccw(c77.138,71.978) 77.138,72.898 ccw(c77.138,73.818) C4.1@77.788,73.167 ; C4.1 C4.1@77.878,72.898 ; Switch4.1 78.613,59.023 v1(78.613,58.547) ; Switch3.1 78.581,77.121 76.549,75.089 74.708,75.089 C8.1 ; C8.1 76.862,73.914 C4.1@77.878,72.898 ; 78.696,77.236 ccw(c78.588,77.343) 78.74,77.343 cw(c78.588,77.343) 78.696,77.236
  Top Layer w1.016: USB1.5@46.251,68.557 ccw(c47.814,68.98) 47.814,67.361 ; USB1.5@46.253,61.27 cw(c47.795,60.83) 47.795,62.433 ; USB1.5@46.805,61.113 46.805,62.426 ; USB1.5@46.805,68.707 46.805,67.622 ; USB1.5@47.23,60.991 cw(c49.142,60.445) 49.142,62.433 46.812,62.433 46.805,62.426 ; USB1.5@47.232,68.823 ccw(c49.142,69.34) 49.142,67.361 47.066,67.361 46.805,67.622 ; USB1.5@46.493,61.425 ccw(c45.738,62.18) 46.805,62.18 ; USB1.5@46.493,61.425 ccw(c45.738,62.18) 46.805,62.18 ; USB1.5@46.493,61.425 ccw(c45.738,62.18) 46.805,62.18 ; USB1.5@46.493,68.395 cw(c45.738,67.64) 46.805,67.64 ; USB1.5@46.493,68.395 cw(c45.738,67.64) 46.805,67.64 ; USB1.5@46.493,68.395 cw(c45.738,67.64) 46.805,67.64 ; 46.805,62.18 ccw(c47.872,62.18) USB1.5@47.118,61.425 ; 46.805,62.18 ccw(c47.872,62.18) USB1.5@47.118,61.425 ; 46.805,62.18 ccw(c47.872,62.18) USB1.5@47.118,61.425 ; 46.805,62.426 46.805,67.622 ; 46.805,67.64 cw(c47.872,67.64) USB1.5@47.118,68.395 ; 46.805,67.64 cw(c47.872,67.64) USB1.5@47.118,68.395 ; 46.805,67.64 cw(c47.872,67.64) USB1.5@47.118,68.395
  Bottom Layer w0.254: R12.1@53.213,67.902 v1(54.15,66.965) ; R9.1@53.467,61.976 cw(c53.467,60.136) 54.768,61.437 ; R9.1@53.467,62.23 cw(c53.467,61.004) 54.334,61.871 ; R9.1 53.721,62.484 v1(54.864,61.341) 54.864,60.284 54.143,59.563 IC1.2 ; R9.1@53.975,62.484 ccw(c54.588,62.484) 54.155,62.05 ; IC1.2@54.074,59.686 ccw(c54.074,60.15) 54.402,59.822 ; C10.1 58.166,59.436 58.801,60.071 ; C10.1@58.191,59.921 ccw(c58.372,60.5) 58.801,60.071 ; C10.1@58.547,59.444 cw(c59.414,59.457) 58.801,60.071 ; v1(61.849,67.437) 63.373,67.437 65.024,65.786 v1(65.913,65.786) ; C12.1@62.611,59.436 61.976,60.071 58.801,60.071
  Bottom Layer w0.381: v1(45.847,60.325) 44.822,59.3 44.822,57.813 44.831,57.804 44.831,57.785 45.339,57.277 46.101,57.277 v1(47.244,56.134) ; C3.1@46.799,56.134 ccw(c45.726,56.134) 46.485,56.893 ccw(c47.244,57.652) C3.1@47.244,56.578 ; 74.803,59.449 76.721,61.366 76.721,62.954 76.708,62.966 76.708,64.135 77.851,65.278 R16.1
  Bottom Layer w0.508: C1.1@46.863,74.676 cw(c46.863,73.756) 47.513,74.407 cw(c48.164,75.057) C1.1@47.244,75.057 ; v1(46.863,75.057) 48.26,73.66 v1(48.26,67.31) ; v1(68.453,61.595) 74.168,61.595 74.803,60.96 74.803,59.449 v1(74.803,58.039) ; v1(69.342,68.199) 69.342,68.326 v1(70.612,69.596) ; 69.745,68.729 ccw(c68.878,69.596) C15.1@70.104,69.596 ; C15.1@70.051,69.035 cw(c70.485,68.602) C15.1@70.485,69.215 ; v1(73.533,65.405) 74.549,66.421 R16.1 ; JP1.1 74.803,54.356 v1(74.803,58.039) ; v1(78.613,58.547) 78.537,58.471 75.235,58.471 v1(74.803,58.039) ; 78.8,66.421 ccw(c78.8,67.99) GND1.1@80.105,67.119 ; GND1.1@79.683,67.401 cw(c77.851,68.622) R16.1 ; GND1.1 79.46,66.421 R16.1
  Bottom Layer w0.762: v1(57.531,56.007) 58.039,56.515 C10.1
  Bottom Layer w1.016: 外接排线1.2 51.435,73.66 53.213,71.882 R10.1 53.213,67.902 R12.1
  other v1: 78.613,77.343
IIC_SCL: *1.21 外接排线1.7 | length 11
  Top Layer w0.254: *1.21 58.313,74.696 60.325,76.708 63.373,76.708 ; 外接排线1.7@63.502,77.628 cw(c62.827,77.254) 63.373,76.708 ; 63.611,76.946 ccw(c63.134,77.424) 外接排线1.7@63.725,77.751 ; 63.768,77.103 cw(c64.135,76.736) 外接排线1.7@64.135,77.255 ; 外接排线1.7 64.135,77.47 63.373,76.708
IIC_SDA: *1.22 外接排线1.6 | length 11.1
  Top Layer w0.254: *1.22 57.813,74.97 60.198,77.355 ; 60.462,77.355 ccw(c60.462,78.02) 外接排线1.6@61.126,77.995 ; 60.725,77.355 ccw(c60.725,78.01) 外接排线1.6@61.38,77.986 ; 外接排线1.6@60.872,78.005 cw(c60.198,78.029) 60.198,77.355 ; 60.989,77.355 ccw(c60.989,78) 外接排线1.6@61.634,77.977 ; 外接排线1.6@60.994,77.577 cw(c60.847,77.479) 60.972,77.355 ; 外接排线1.6@61.194,77.377 ccw(c61.096,77.23) 60.972,77.355 ; 外接排线1.6 60.972,77.355 ; 60.198,77.355 60.972,77.355
MPU_INT: *1.19 外接排线1.8 | length 11.9
  Top Layer w0.254: *1.19 59.313,74.807 60.706,76.2 66.04,76.2 66.675,76.835 ; 外接排线1.8@66.365,77.325 cw(c66.133,76.835) 66.675,76.835 ; 外接排线1.8 66.675,76.835 ; 外接排线1.8@66.985,77.325 ccw(c67.217,76.835) 66.675,76.835
Net*1_5: *1.5 C9.2 R7.2 X3.1 | length 23.2
  Top Layer w0.254: *1.5 R7.2@66.917,68.465 ; 65.674,68.465 cw(c65.674,67.198) R7.2@66.57,68.094 ; 65.732,68.465 ccw(c65.732,69.65) R7.2@66.57,68.812 ; 66.287,68.465 cw(c66.287,67.811) R7.2@66.749,68.273 ; R7.2 67.762,68.453 68.181,68.873 70.348,68.873 71.479,67.742 71.247,67.51 C9.2 ; R7.2@67.381,68.221 cw(c67.761,68.025) 67.761,68.453 cw(c67.761,68.881) R7.2@67.381,68.685 ; 70.617,68.604 ccw(c71.501,69.488) X3.1@71.501,68.238 ; 70.725,68.496 cw(c69.994,67.765) X3.1@71.028,67.765 ; C9.2@70.888,65.764 ccw(c70.021,66.631) 71.247,66.631 ccw(c72.473,66.631) C9.2@71.606,65.764 ; C9.2@70.993,65.845 ccw(c70.514,66.674) 71.439,66.426 ; X3.1@71.051,68.17 ccw(c71.501,68.621) X3.1@71.501,67.984 ; C9.2@71.247,65.71 cw(c73.256,65.71) X3.1@71.835,67.13 ; 71.247,66.323 cw(c72.643,66.323) X3.1@71.656,67.31 ; 71.347,66.082 ccw(c71.932,65.925) C9.2@71.449,65.559 ; 71.481,66.582 ccw(c72.454,66.321) C9.2@71.652,65.712
Net*1_6: *1.6 C11.2 R7.1 X3.3 | length 19.6
  Top Layer w0.254: *1.6 65.155,68.965 R7.1 67.72,70.739 ; R7.1@66.421,70.739 cw(c65.195,70.739) 66.062,69.872 cw(c66.929,69.005) R7.1@66.929,70.231 ; R7.1@67.391,70.528 cw(c67.72,70.377) 67.72,70.739 ; R7.1@67.391,70.95 ccw(c67.72,71.101) 67.72,70.739 ; 68.125,71.144 cw(c68.897,70.373) X3.3@68.95,71.462 ; X3.3@68.365,71.384 ccw(c68.068,71.681) X3.3@68.488,71.681 ; X3.3@68.627,72.316 ccw(c67.819,73.123) 68.961,73.123 ccw(c70.103,73.123) X3.3@69.295,72.316 ; C11.2@68.674,73.366 cw(c67.909,72.822) 68.815,72.579 cw(c69.782,72.321) C11.2@69.322,73.209 ; C11.2@68.729,73.301 cw(c68.168,72.74) 68.961,72.74 cw(c70.008,72.74) C11.2@69.268,73.48 ; X3.3@68.938,71.209 ccw(c68.859,69.6) 67.72,70.739 ; X3.3@68.939,71.958 67.72,70.739 ; X3.3 C11.2@68.961,73.533 ; X3.3@68.961,72.127 cw(c70.621,72.127) C11.2@69.447,73.301
NetBuzzle1_2: Buzzle1.2 Q1.3 VD3.1 | length 22.2
  Top Layer w0.254: Buzzle1.2@63.524,59.191 cw(c63.543,59.21) 63.516,59.21 cw(c63.543,59.21) Buzzle1.2@63.524,59.229 ; 63.957,58.758 cw(c64.41,59.21) 63.77,59.21 cw(c64.41,59.21) 63.957,59.662 ; 64.391,58.324 cw(c65.277,59.21) 64.024,59.21 cw(c65.277,59.21) 64.391,60.096 ; 64.825,57.89 cw(c66.144,59.21) 64.278,59.21 cw(c66.144,59.21) 64.825,60.53 ; Q1.3@67.368,63.413 ccw(c67.2,63.245) 67.2,63.482 ccw(c67.2,63.719) Q1.3@67.368,63.551 ; Q1.3 66.53,63.482 65.786,62.738 65.786,61.491 Buzzle1.2 66.2,56.515 69.179,56.515 VD3.1 ; 69.721,55.973 ccw(c70.358,56.61) VD3.1@70.358,55.709 ; VD3.1@69.963,55.731 cw(c69.667,55.436) VD3.1@70.085,55.436
NetC2_1: C2.1 U1.8 VD2.2 | length 25.1
  Top Layer w0.254: VD2.2 74.386,55.336 C2.1 ; VD2.2@72.57,55.336 ccw(c72.57,57.986) C2.1@74.444,56.112 ; VD2.2@72.656,55.659 ccw(c73.195,56.424) 73.388,55.508 ; VD2.2@72.692,55.143 cw(c73.158,54.677) 73.158,55.336 cw(c73.158,55.995) VD2.2@72.692,55.529 ; VD2.2@72.727,55.287 cw(c72.958,55.137) 72.901,55.406 ; 73.183,55.336 ccw(c73.183,57.373) C2.1@74.623,55.933 ; 73.796,55.336 ccw(c73.796,56.76) C2.1 ; C2.1@75.209,55.448 cw(c75.819,54.991) 75.819,55.753 ; C2.1@75.209,56.058 ccw(c75.819,56.515) 75.819,55.753 ; U1.8@80.685,61.94 ccw(c80.475,62.15) 80.772,62.15 ccw(c81.069,62.15) U1.8@80.859,61.94 ; U1.8 80.772,62.23 80.264,62.738 79.248,62.738 78.922,62.412 78.922,59.889 79.07,59.741 79.324,59.741 79.511,59.554 79.511,58.319 78.85,57.658 77.089,57.658 76.581,57.15 76.581,56.515 75.819,55.753 ; C2.1 75.819,55.753
NetC4_2: C4.2 U1.1 X1.2 | length 14.4
  Top Layer w0.254: C4.2@79.984,72.539 cw(c79.117,71.672) 80.343,71.672 cw(c81.57,71.672) C4.2@80.703,72.539 ; 80.193,72.234 ccw(c81.333,72.54) X1.2@80.837,71.469 ; X1.2@80.333,71.71 ccw(c81.036,71.898) X1.2@80.73,71.238 ; 80.343,71.952 ccw(c81.196,71.952) X1.2@80.725,71.241 ; C4.2@80.343,72.425 ccw(c81.51,72.425) X1.2@80.865,71.453 ; X1.2@80.41,70.636 cw(c79.536,69.762) U1.1@80.772,69.762 ; U1.1@80.665,69.789 ccw(c80.381,69.952) 80.698,70.037 ; U1.1@80.685,69.814 ccw(c80.475,70.024) 80.772,70.024 ccw(c81.069,70.024) U1.1@80.859,69.814 ; 80.709,69.995 ccw(c80.966,70.064) U1.1@80.833,69.834 ; U1.1@80.772,68.834 80.772,71.093 X1.2 80.343,71.521 C4.2 ccw(c81.823,72.898) X1.2@81.006,71.664 ; U1.1@80.772,69.894 cw(c81.82,69.894) X1.2@81.079,70.636 ; 80.834,70.126 ccw(c81.263,70.011) U1.1@80.878,69.789
NetC10_2: C10.2 IC1.4 R4.1 R5.2 | length 37.2
  Bottom Layer w0.254: R5.2@44.726,67.84 cw(c43.859,66.973) 45.085,66.973 cw(c46.311,66.973) R5.2@45.444,67.84 ; R5.2 45.085,62.865 49.337,58.613 IC1.4 50.924,57.915 51.816,57.023 54.229,57.023 55.753,58.547 ; IC1.4@50.487,58.526 ccw(c50.277,58.316) 50.277,58.613 ccw(c50.277,58.91) IC1.4@50.487,58.7 ; IC1.4@50.837,58.526 cw(c50.627,58.316) 50.924,58.316 cw(c51.221,58.316) IC1.4@51.011,58.526 ; C10.2@55.495,58.998 cw(c55.229,58.547) 55.753,58.547 ; C10.2@55.558,59.905 ccw(c55.436,60.198) 55.753,60.198 ; 55.764,60.209 ccw(c56.157,59.817) C10.2 ; C10.2@55.938,59.61 cw(c56.347,59.996) 55.949,60.394 ; C10.2@55.948,59.905 cw(c56.07,60.198) 55.753,60.198 ; C10.2@56.011,58.998 ccw(c56.277,58.547) 55.753,58.547 ; C10.2@56.122,59.785 cw(c56.537,60.176) 56.134,60.579 ; R4.1@61.468,61.722 cw(c60.242,61.722) 61.109,60.855 cw(c61.976,59.988) R4.1@61.976,61.214 ; R4.1 60.833,60.579 56.134,60.579 ; 55.753,58.547 C10.2 ; C10.2 55.753,60.198 ; 55.753,60.198 56.134,60.579
NetF1_1: F1.1 VD1.1 | length 3.3
  Top Layer w0.381: VD1.1@49.479,72.242 cw(c49.056,71.819) 49.654,71.819 ; F1.1@49.49,70.887 ccw(c49.093,71.284) 49.654,71.284 ; 49.654,71.206 ccw(c50.105,71.206) F1.1@49.786,70.887 ; 49.654,71.949 cw(c50.068,71.949) VD1.1@49.775,72.242 ; VD1.1@49.654,72.39 49.654,70.831 F1.1
NetF1_2: F1.2 USB1.1 | length 6.7
  Top Layer w0.406: USB1.1 51.08,66.193 51.41,66.523 51.41,70.549 F1.2@51.422,70.561 ; 51.41,70.065 cw(c52.166,70.065) F1.2@51.631,70.6
NetIC1_1: IC1.1 LED2.2 | length 15.4
  Top Layer w0.254: LED2.2 48.205,70.667 v1(50.419,68.453) ; LED2.2@47.367,70.442 cw(c47.909,69.9) 47.909,70.667 cw(c47.909,71.433) LED2.2@47.367,70.891 ; v1(51.943,66.929) 51.943,65.913 53.724,64.132 v1(53.724,60.957)
  Bottom Layer w0.254: v1(50.419,68.453) v1(51.943,66.929) ; IC1.1@53.637,60.6 ccw(c53.427,60.81) 53.724,60.81 ccw(c54.021,60.81) IC1.1@53.811,60.6 ; v1@53.721,60.96 v1(53.724,60.957) IC1.1
NetIC1_5: IC1.5 LED1.2 | length 16
  Bottom Layer w0.254: v1(46.99,72.651) 46.99,62.103 49.53,59.563 IC1.5 ; IC1.5@50.487,59.476 ccw(c50.277,59.266) 50.277,59.563 ccw(c50.277,59.86) IC1.5@50.487,59.65
NetIC1_6: IC1.6 R9.2 | length 4.3
  Bottom Layer w0.254: R9.2@50.822,62.125 cw(c49.955,61.258) 51.181,61.258 cw(c52.407,61.258) R9.2@51.54,62.125 ; 51.181,61.034 ccw(c51.795,61.034) IC1.6@51.361,60.6 ; R9.2 51.181,60.77 ccw(c51.319,60.77) IC1.6@51.295,60.634
NetLED1_1: LED1.1 LED2.1 R5.1 | length 4.2
  Top Layer w0.381: LED2.1@44.994,70.847 ccw(c44.468,71.372) 45.212,71.372 ; LED1.1@45.033,72.471 cw(c44.599,72.037) 45.212,72.037 cw(c45.825,72.037) LED1.1@45.392,72.471 ; LED2.1 45.212,70.705 LED1.1 ; 45.212,71.188 ccw(c45.695,71.188) LED2.1@45.354,70.847 ; LED2.1@45.27,70.713 ccw(c44.906,70.875) LED2.1@45.278,71.018
  other v1: 45.212,70.739
NetQ1_1: Q1.1 R15.2 | length 8.1
  Top Layer w0.254: Q1.1@66.418,60.87 cw(c66.25,60.702) 66.487,60.702 cw(c66.724,60.702) Q1.1@66.556,60.87 ; Q1.1 66.487,60.386 66.489,60.384 70.163,60.384 R15.2 ; 68.66,60.384 ccw(c68.66,62.277) R15.2@69.999,60.938 ; 69.274,60.384 ccw(c69.274,61.663) R15.2@70.178,60.759 ; 69.603,60.384 cw(c69.603,59.824) R15.2@69.999,60.22
NetU1_2: U1.2 X1.1 | length 6.4
  Top Layer w0.254: X1.1 79.121,71.12 79.502,70.739 U1.2@79.502,68.834 ; X1.1@77.779,70.786 cw(c78.586,69.978) 78.586,71.12 cw(c78.586,72.262) X1.1@77.779,71.454 ; U1.2@79.415,69.814 ccw(c79.205,70.024) 79.502,70.024 ccw(c79.799,70.024) U1.2@79.589,69.814
NRST: *1.7 C15.2 R14.1 | length 16
  Top Layer w0.254: v1(62.361,69.465) *1.7
  Bottom Layer w0.254: v1@62.357,69.469 63.83,70.942 66.853,70.942 C15.2 ; C15.2@67.691,69.596 ccw(c66.465,69.596) 67.332,70.463 ccw(c68.199,71.33) C15.2@68.199,70.104
  Bottom Layer w0.381: C15.2@67.885,69.282 cw(c67.043,68.44) 68.233,68.44 ; R14.1@67.919,67.624 ccw(c67.16,68.383) 68.233,68.383 ccw(c69.307,68.383) R14.1@68.548,67.624 ; C15.2 68.199,69.469 68.233,69.435 R14.1 ; 68.233,68.606 cw(c69.189,68.606) C15.2@68.513,69.282
OLED_DC_PIN: *1.32 外接排线1.11 | length 26.8
  Top Layer w0.254: *1.32 57.797,68.465 v1(58.42,69.088)
  Bottom Layer w0.254: v1(58.42,69.088) 64.897,75.565 73.279,75.565 74.295,76.581 ; 外接排线1.11@73.878,77.388 cw(c73.307,76.581) 74.295,76.581 ; 外接排线1.11@74.024,77.595 cw(c73.654,77.072) 74.295,77.072 cw(c74.936,77.072) 外接排线1.11@74.566,77.595 ; 外接排线1.11 74.295,76.581 ; 外接排线1.11@74.712,77.388 ccw(c75.283,76.581) 74.295,76.581
OLED_RST_PIN: *1.33 外接排线1.12 | length 33.4
  Top Layer w0.254: *1.33 58.186,67.965 v1(58.42,68.199)
  Bottom Layer w0.254: v1(58.42,68.199) 65.024,74.803 74.295,74.803 76.835,77.343 外接排线1.12 ; 75.152,75.66 ccw(c72.834,77.978) 外接排线1.12@76.112,77.978 ; 75.585,76.093 ccw(c73.701,77.978) 外接排线1.12@76.366,77.978 ; 76.019,76.527 ccw(c74.568,77.978) 外接排线1.12@76.62,77.978 ; 76.453,76.961 ccw(c75.435,77.978) 外接排线1.12@76.874,77.978
OLED_SCK_PIN: *1.15 外接排线1.10 | length 17.5
  Top Layer w0.254: *1.15 61.313,75.029 61.57,75.286 70.587,75.286 71.755,76.454 ; 外接排线1.10@71.298,77.418 cw(c70.51,76.454) 71.755,76.454 ; 外接排线1.10@71.458,77.615 cw(c70.948,76.989) 71.755,76.989 cw(c72.562,76.989) 外接排线1.10@72.052,77.615 ; 外接排线1.10@71.755,77.724 71.755,76.454 ; 外接排线1.10@72.212,77.418 ccw(c73,76.454) 71.755,76.454
OLED_SDA_PIN: *1.17 外接排线1.9 | length 16.5
  Top Layer w0.254: *1.17@60.333,73.462 60.333,74.938 61.138,75.743 68.631,75.743 69.215,76.327 ; 外接排线1.9@68.725,77.447 cw(c67.692,76.327) 69.215,76.327 ; 外接排线1.9@68.897,77.633 cw(c68.227,76.907) 69.215,76.907 cw(c70.203,76.907) 外接排线1.9@69.533,77.633 ; 外接排线1.9@69.215,77.724 69.215,76.327 ; 外接排线1.9@69.705,77.447 ccw(c70.738,76.327) 69.215,76.327
PA0: *1.10 C1.2 Switch1.2 U1.3 | length 66.7
  Top Layer w0.254: v1(46.863,77.343) 46.863,77.611 Switch1.2 ; v1(49.403,79.248) v1(50.927,79.248) ; v1(62.23,71.247) 62.512,70.965 *1.10 ; U1.3 78.232,69.977 v1(78.613,70.358) ccw(c79.236,69.735) U1.3@78.355,69.728
  Bottom Layer w0.254: C1.2@46.605,77.781 ccw(c46.339,78.232) 46.863,78.232 ; v1(46.863,77.343) 46.863,78.232 ; C1.2@47.121,77.781 cw(c47.387,78.232) 46.863,78.232 ; v1(49.403,79.248) 47.879,79.248 46.863,78.232 ; v1(50.927,79.248) 78.867,79.248 79.756,78.359 79.756,73.66 78.613,72.517 76.454,72.517 ; v1(62.23,71.247) 63.5,72.517 76.454,72.517 ; v1(78.613,70.358) 76.454,72.517
PA2: *1.12 C3.2 Switch2.2 | length 24.2
  Top Layer w0.254: Switch2.2 48.554,58.968 v1(53.213,63.627) ; Switch2.2@47.703,58.881 cw(c47.913,58.671) 47.913,58.968 cw(c47.913,59.265) Switch2.2@47.703,59.055 ; v1(61.341,68.834) 61.341,71.005 62.301,71.965 *1.12
  Top Layer w0.508: v1(47.244,58.42) 47.244,58.946 Switch2.2
  Bottom Layer w0.254: v1(53.213,63.627) 53.917,64.331 56.446,64.331 60.948,68.834 v1(61.341,68.834)
PA3: *1.13 C5.2 Switch3.2 | length 25
  Top Layer w0.254: *1.13 66.051,73.442 67.285,74.676 71.882,74.676 72.898,75.692 v1(76.2,75.692)
  Top Layer w0.508: Switch3.2 78.613,74.531 v1(78.613,75.057)
  Bottom Layer w0.254: 76.736,75.692 cw(c76.736,73.521) C5.2@78.416,74.896 ; 77.272,75.692 cw(c77.272,73.96) v1(78.613,75.057) 77.978,75.692 v1(76.2,75.692) cw(c76.2,73.082) C5.2@78.22,74.735 ; 77.809,75.692 cw(c77.809,74.399) C5.2@78.81,75.218
PA4: *1.14 C6.2 Switch4.2 | length 42.4
  Top Layer w0.254: *1.14 61.813,74.665 61.976,74.828 65.253,74.828 v1(65.913,74.168) ; 77.207,74.395 ccw(c76.835,74.023) v1(76.835,74.549) 77.053,74.549 77.739,73.863 78.829,73.863 79.248,73.444 v1(79.248,71.755)
  Top Layer w0.508: Switch4.2 78.613,55.637 v1(78.613,56.261)
  Bottom Layer w0.254: v1(65.913,74.168) 75.184,74.168 75.565,74.549 v1(76.835,74.549) ; v1(78.613,56.261) 79.756,57.404 79.756,58.801 81.28,60.325 81.28,70.866 80.391,71.755 v1(79.248,71.755) ; C6.2@78.613,56.769 ccw(c78.613,57.995) 79.48,57.128 ccw(c80.347,56.261) C6.2@79.121,56.261
PA6: *1.16
PA8: *1.29 外接排线1.3 | length 15.2
  Top Layer w0.254: *1.29 56.63,69.965 56.998,70.333 v1(56.998,70.968)
  Bottom Layer w0.254: 外接排线1.3@53.464,77.467 cw(c52.23,76.233) 53.975,76.233 cw(c55.72,76.233) 外接排线1.3@54.486,77.467 ; 外接排线1.3@53.643,77.646 cw(c52.843,76.846) 53.975,76.846 cw(c55.107,76.846) 外接排线1.3@54.307,77.646 ; 外接排线1.3 53.975,73.99 v1(56.998,70.968)
PA9: *1.30 外接排线1.4 | length 15.2
  Top Layer w0.254: *1.30 56.943,69.465 57.455,69.977 v1(57.455,70.485)
  Bottom Layer w0.254: 外接排线1.4@56.004,77.467 cw(c54.77,76.233) 56.515,76.233 cw(c58.26,76.233) 外接排线1.4@57.026,77.467 ; 外接排线1.4@56.183,77.646 cw(c55.383,76.846) 56.515,76.846 cw(c57.647,76.846) 外接排线1.4@56.847,77.646 ; 外接排线1.4 56.515,73.533 57.455,72.593 v1(57.455,70.485)
PA10: *1.31 外接排线1.5 | length 15.6
  Top Layer w0.254: *1.31 57.142,68.965 57.912,69.735 v1(57.912,70.104)
  Bottom Layer w0.254: v1(57.912,70.104) 57.912,76.835 ; 外接排线1.5@58.333,77.938 cw(c56.89,77.857) 57.912,76.835 ; 外接排线1.5@58.587,77.952 cw(c57.651,77.9) 58.314,77.237 cw(c58.977,76.574) 外接排线1.5@59.029,77.51 ; 外接排线1.5@59.015,77.256 ccw(c58.934,75.813) 57.912,76.835 ; 外接排线1.5 57.912,76.835
PB2: *1.20 R10.2 | length 11.5
  Top Layer w0.254: v1(58.801,72.263) 58.813,72.275 *1.20
  Bottom Layer w0.254: R10.2@55.685,69.515 ccw(c56.959,70.702) 56.959,68.961 ; R10.2@55.871,69.688 ccw(c57.542,71.246) 57.542,68.961 ; 56.375,68.961 cw(c56.375,70.158) R10.2 55.88,68.961 57.543,68.961 ; v1(58.801,72.263) 58.801,70.219 57.543,68.961
PB5: *1.41
PB6: *1.42 R2.2 U1.6 | length 29.3
  Top Layer w0.254: *1.42 v1(59.313,66.417) v1@59.313,66.421 ; v1(62.986,63.748) v1@64.005,64.767 ; v1@65.989,64.846 v1(67.691,64.846) ; R2.2 v1(73.85,64.135) 74.105,64.389 77.216,64.389 78.232,63.373 U1.6@78.232,60.96 ; R2.2@72.581,63.373 ccw(c72.581,64.599) 73.448,63.732 ccw(c74.315,62.865) R2.2@73.088,62.865 ; U1.6@78.145,61.94 ccw(c77.935,62.15) 78.232,62.15 ccw(c78.529,62.15) U1.6@78.319,61.94
  Bottom Layer w0.254: v1(59.313,66.417) 61.982,63.748 v1(62.986,63.748) ; v1(64.059,64.846) v1(65.964,64.846) ; v1(67.691,64.846) 73.203,64.846 73.85,64.198 v1(73.85,64.135)
PB7: *1.43 R1.2 U1.5 | length 29.6
  Top Layer w0.254: *1.43 59.813,66.163 60.071,66.421 v1(60.96,66.421) ; R1.2@74.608,63.334 ccw(c74.486,63.627) v1(74.803,63.627) ; R1.2@74.803,62.357 cw(c74.803,60.517) 76.104,61.818 ; R1.2@74.803,62.611 cw(c74.803,61.385) 75.67,62.252 ; R1.2@74.998,63.334 cw(c75.12,63.627) v1(74.803,63.627) ; R1.2@75.227,62.695 ccw(c76.962,64.429) U1.5@76.962,61.976 ; R1.2@75.311,62.865 ccw(c75.924,62.865) 75.491,62.431 ; 75.661,62.261 ccw(c76.962,63.562) U1.5@76.962,61.722 ; 76.095,61.827 ccw(c76.962,62.695) U1.5@76.962,61.468 ; 76.528,61.394 ccw(c76.962,61.827) U1.5@76.962,61.214 ; U1.5@76.962,60.96 75.057,62.865 R1.2 v1(74.803,63.627)
  Bottom Layer w0.254: v1(60.96,66.421) 61.468,66.421 64.262,63.627 v1(74.803,63.627)
PB8: *1.45
PB9: *1.46
PB12: *1.25 JP3.1 | length 53.8
  Top Layer w0.254: 53.786,73.541 cw(c52.21,71.965) *1.25@54.438,71.965 ; 54.219,73.107 cw(c53.077,71.965) *1.25@54.692,71.965 ; 54.653,72.673 cw(c53.944,71.965) *1.25@54.946,71.965 ; 55.087,72.24 cw(c54.812,71.965) *1.25@55.2,71.965 ; *1.25 53.362,73.965 52.019,73.965 49.784,76.2 46.808,76.2 46.228,76.78 46.228,78.613 47.244,79.629 47.244,81.915 48.133,82.804 76.327,82.804 76.962,82.169 ; JP3.1@76.652,81.679 ccw(c76.42,82.169) 76.962,82.169 ; JP3.1@76.962,80.772 JP3.1 76.962,82.169 ; JP3.1@77.272,81.679 cw(c77.504,82.169) 76.962,82.169
PB13: *1.26 JP4.1 | length 18.9
  Top Layer w0.254: v1(50.165,73.787) 50.673,73.279 52.705,73.279 53.34,72.644 53.34,71.882 53.757,71.465 *1.26
  Bottom Layer w0.254: JP4.1@48.768,80.303 cw(c48.768,78.558) 50.002,79.792 cw(c51.236,81.026) JP4.1@49.491,81.026 ; JP4.1@48.768,80.557 cw(c48.768,79.425) 49.569,80.225 cw(c50.369,81.026) JP4.1@49.237,81.026 ; JP4.1 50.165,79.629 v1(50.165,73.787)
PB14: *1.27
PB15: *1.28
PC13: *1.2
PC14: *1.3 C7.2 X2.2 | length 13.8
  Top Layer w0.254: *1.3 65.123,67.465 65.405,67.183 65.405,65.532 65.608,65.329 67.234,65.329 v1(67.246,65.341) ; C7.2 v1(73.533,67.945) X2.2
  Bottom Layer w0.254: v1(67.246,65.341) 71.945,65.341 73.533,66.929 v1(73.533,67.945)
PC15: *1.4 C8.2 X2.1 | length 15.3
  Top Layer w0.254: *1.4 65.512,67.965 v1(66.675,66.802) ; v1(73.406,71.501) ccw(c73.099,71.808) X2.1@73.533,71.808 ; C8.2 X2.1@73.533,71.882
  Bottom Layer w0.254: v1(66.675,66.802) 67.246,66.23 71.819,66.23 72.39,66.802 72.39,70.485 v1(73.406,71.501)
TCLK: *1.37 R16.2 TCLK1.1 | length 43.4
  Top Layer w0.254: v1(56.813,63.583) *1.37 ; v1(75.692,65.659) 75.692,66.548 v1(76.327,67.183)
  Bottom Layer w0.254: v1(56.813,63.583) 57.226,63.17 75.108,63.17 75.692,63.754 v1(75.692,65.659) ; v1(76.327,67.183) 76.708,67.564 77.343,67.564 ; R16.2@77.428,68.425 cw(c76.86,68.047) 77.343,67.564 ; 77.562,67.783 ccw(c77.123,68.222) R16.2@77.64,68.566 ; 77.781,68.002 ccw(c77.386,68.397) R16.2 ; R16.2@77.851,69.215 ccw(c77.851,70.441) 78.718,69.574 ccw(c79.585,68.707) R16.2@78.359,68.707 ; R16.2@78.21,69.066 cw(c79.767,67.51) TCLK1.1@80.078,69.689 ; 78.57,69.426 cw(c79.857,68.139) TCLK1.1@80.114,69.941 ; 78.929,69.785 cw(c79.946,68.768) TCLK1.1@80.15,70.192 ; 79.288,70.144 cw(c80.036,69.397) TCLK1.1@80.185,70.444 ; TCLK1.1@79.489,69.921 ccw(c79.248,69.853) 79.248,70.104 ; TCLK1.1@79.489,70.287 cw(c79.248,70.355) 79.248,70.104 ; TCLK1.1@80.042,69.438 ccw(c79.677,66.881) R16.2 ; TCLK1.1 79.248,70.104 ; 77.343,67.564 77.851,68.072 R16.2 ; R16.2 79.248,70.104
TD0/PB3: *1.39
TDI/PA15: *1.38
TMS: *1.34 R13.1 TMS1.1 | length 35.7
  Top Layer w0.254: *1.34 53.792,67.465 53.594,67.267 53.594,66.571 56.157,64.008 56.159,64.008 56.159,62.967 v1(56.388,62.738) ; v1(76.2,62.738) 77.343,62.992 v1(77.47,63.119) ; v1(77.47,63.119) cw(c77.192,63.296) 77.264,62.974 ccw(c77.192,63.296) v1(77.47,63.119)
  Bottom Layer w0.254: v1(56.388,62.738) 56.413,62.713 76.175,62.713 v1(76.2,62.738) ; v1(77.47,63.119) R13.1@77.851,63.119 ; R13.1 79.29,63.246 ; R13.1@78.21,62.887 cw(c79.077,62.02) 79.077,63.246 cw(c79.077,64.472) R13.1@78.21,63.605 ; TMS1.1@79.483,63.934 cw(c78.775,63.761) 79.29,63.246 ; TMS1.1@79.978,63.439 ccw(c79.806,62.731) 79.29,63.246 ; TMS1.1 79.29,63.246
TRST/PB4: *1.40
VBAT: *1.1 R3.2 | length 6.6
  Top Layer w0.254: *1.1 64.516,65.739 R3.2 ; R3.2@64.157,62.462 ccw(c63.29,63.329) 64.516,63.329 ccw(c65.742,63.329) R3.2@64.875,62.462
VDDA: *1.9 R8.2 | length 9.7
  Top Layer w0.254: v1(62.429,70.445) *1.9@64.024,70.445
  Bottom Layer w0.254: v1(62.429,70.445) 63.485,71.501 R8.2 ; R8.2@67.84,71.142 ccw(c66.973,70.275) 66.973,71.501 ccw(c66.973,72.727) R8.2@67.84,71.86
VUSB: R4.2 VD1.2 | length 18.5
  Top Layer w0.254: VD1.2@52.454,72.263 VD1.2@52.454,72.671
  Top Layer w0.508: VD1.2@52.324,72.287 cw(c51.741,71.704) 52.565,71.704 ; VD1.2 52.454,72.263 52.565,72.152 52.565,66.434 54.991,64.008 54.991,62.509 v1(55.702,61.798)
  Bottom Layer w0.254: v1(55.702,61.798) v1@55.778,61.798
  Bottom Layer w0.508: v1@55.778,61.722 R4.2 ; R4.2@59.421,61.453 ccw(c58.77,60.802) 58.77,61.722 ccw(c58.77,62.642) R4.2@59.421,61.991
pads on no net: Buzzle1.3 Switch1. Switch2. Switch3. Switch4. U1.7 USB1.4
copper on no net: | length 57.2
  Bottom Layer w0.254: 40.435,82.514 40.934,84.041 ; 40.631,51.051 41.148,49.53 ; 40.68,84.039 41.188,84.042 ; 40.894,49.528 41.402,49.532 ; 40.993,74.555 40.934,84.041 ; 41.089,59.016 41.148,49.53 ; 41.451,82.52 40.934,84.041 ; 41.647,51.057 41.148,49.53 ; 43.559,87.249 43.563,86.741 ; 45.08,87.518 43.561,86.995 ; 45.09,86.502 43.561,86.995 ; 55.222,87.108 43.561,86.995 ; 71.27,87.263 82.931,87.376 ; 81.402,87.869 82.931,87.376 ; 81.412,86.853 82.931,87.376 ; 82.929,87.63 82.933,87.122
  other v2: 45.466,56.388 80.391,56.495 45.466,58.088 80.391,58.195 80.391,75.389 45.441,75.409 80.391,77.089 45.441,77.109
  other v3: 63.805,57.41 67.005,57.41

## Polygon pours and split planes (outlines as drawn)
GND on Top Layer "Bottom Layer-No Net" (solid, pour order 2): 47.498,79.756 47.498,53.975 78.232,53.975 78.232,79.756
GND on Bottom Layer "Bottom Layer-No Net" (solid, pour order 4): 47.498,79.756 47.498,53.975 78.232,53.975 78.232,79.756

## Other copper
Top Layer:
  rectangle net +: 52.324,57.658 57.023,58.674
Bottom Layer:
  rectangle net +: 52.324,57.658 54.356,58.928
  text "39.372 (mm)" at 55.485,86.196 h1.52 r0.55
  text "34.511 (mm)" at 40.08,74.296 h1.52 r270.36

## Silkscreen, mask and mechanical layers (free items; w line width, h text height)
Mechanical 1:
  lines w0.1: 51.937,51.665 cw(c51.937,52.665) 51.937,53.665 73.937,53.665 cw(c73.937,52.665) 73.937,51.665 51.937,51.665 ; 51.985,79.944 cw(c51.985,80.944) 51.985,81.944 73.985,81.944 cw(c73.985,80.944) 73.985,79.944 51.985,79.944
  lines w0.254: 44.196,54.991 ccw(c44.427,54.959) 44.395,54.727 cw(c44.196,52.705) 46.228,52.705 ccw(c49.022,52.705) 49.022,49.911 76.962,49.911 ccw(c76.962,52.705) 79.756,52.705 cw(c81.534,52.705) 81.36,54.474 ccw(c81.316,54.693) 81.534,54.737 81.534,78.359 ccw(c81.274,78.364) 81.279,78.624 cw(c81.513,81.005) 79.121,80.984 ccw(c76.433,81.005) 76.454,83.693 49.149,83.693 ccw(c49.149,81.026) 46.482,81.026 cw(c44.196,81.026) 44.42,78.751 ccw(c44.441,78.506) 44.196,78.486 44.196,54.991